# Altium PCB version_1.PcbDoc
Units mil, origin at the board's own origin, x right, y up, seen from the top; angles counter-clockwise.
Board outline 2508.5 x 2480.66 mil, 2 copper layers (Top Layer, Bottom Layer); 57 components, 60 nets, 267 pads, 58 vias.
Unrouted connection lines stored in the file: 46.
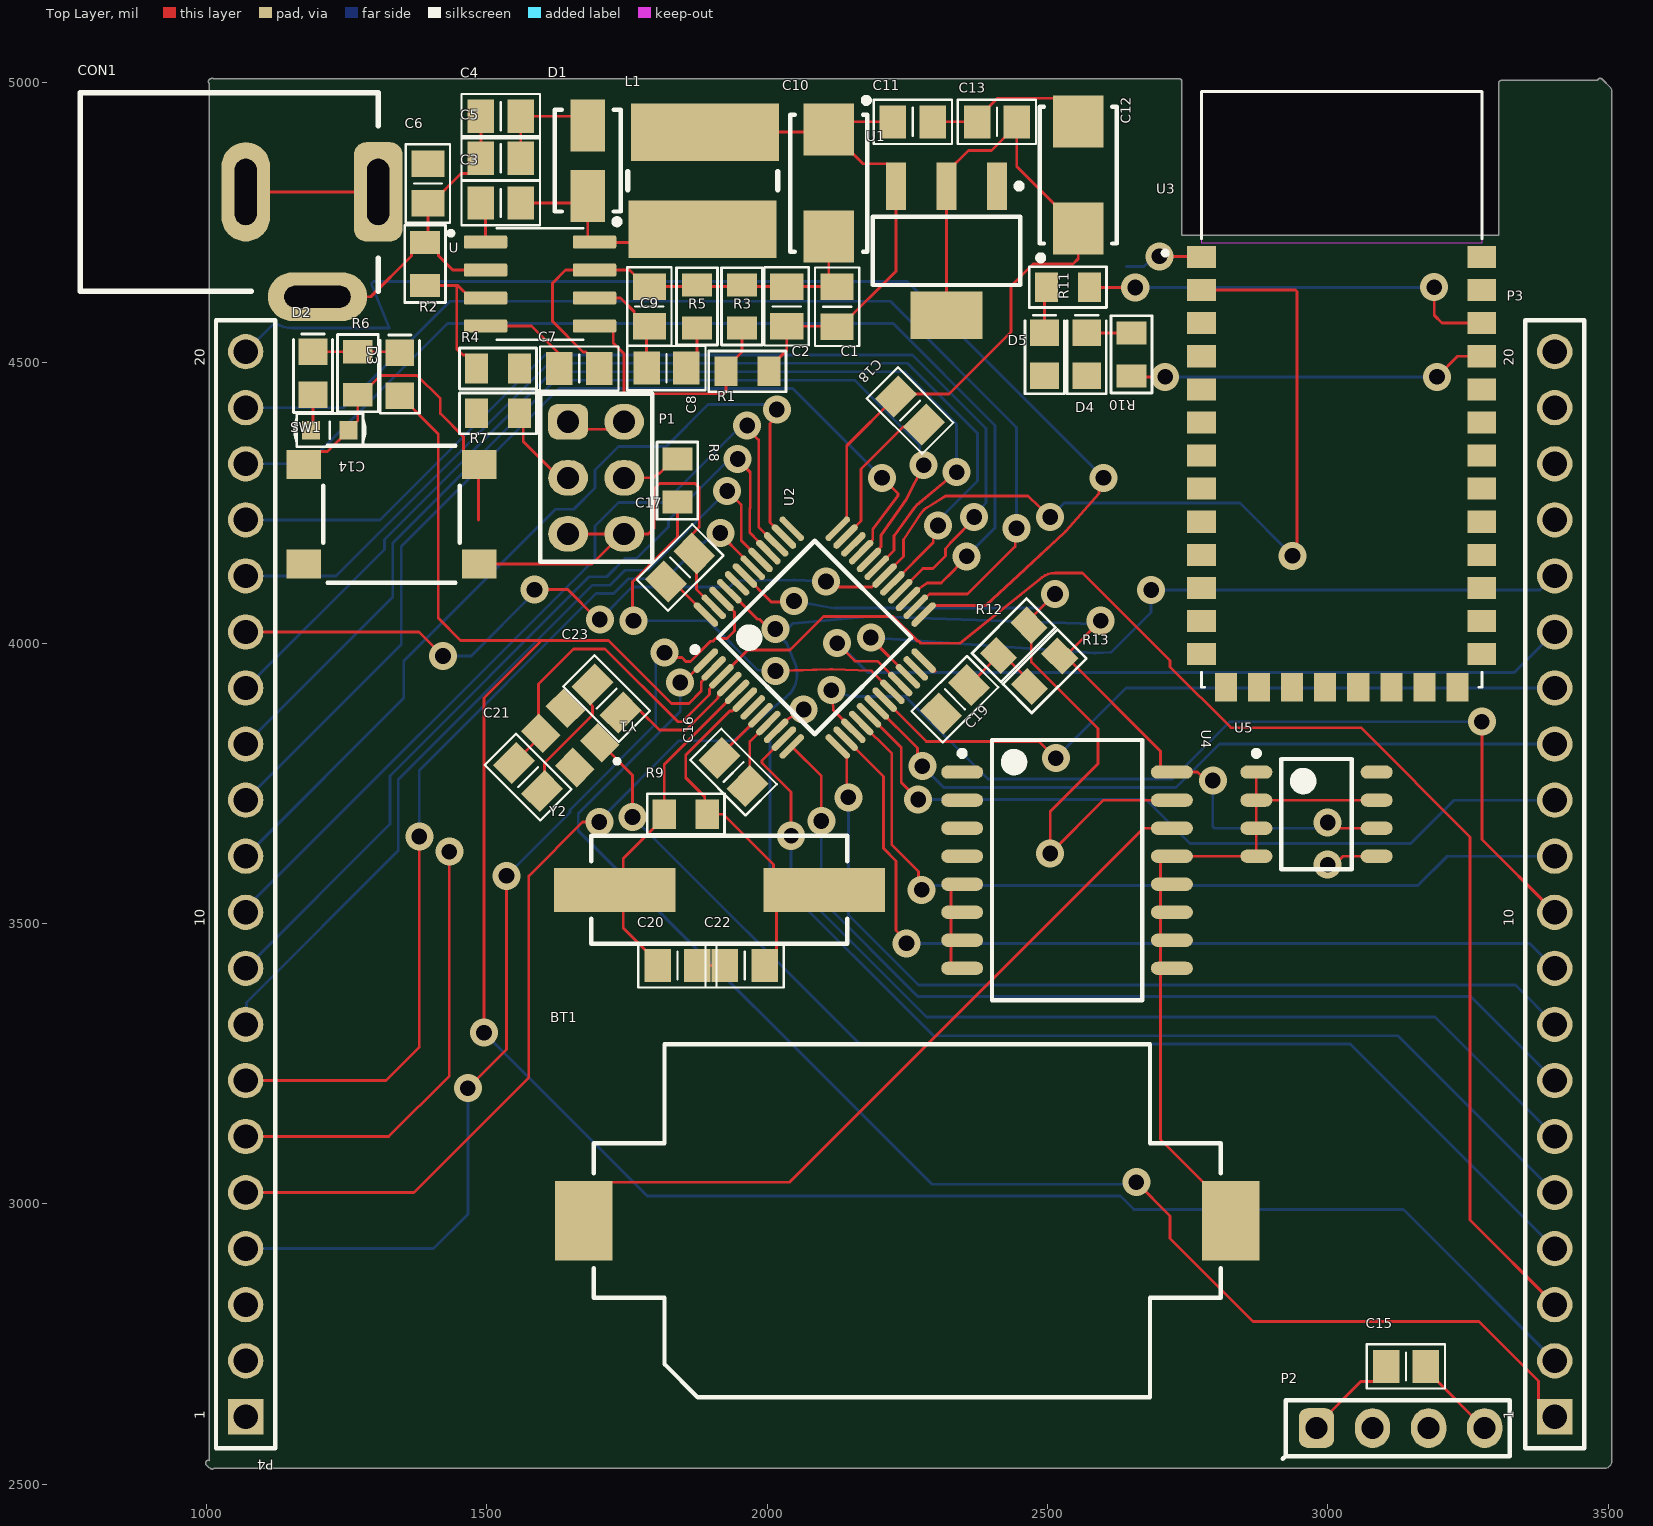
[diagram p0: Top Layer view]
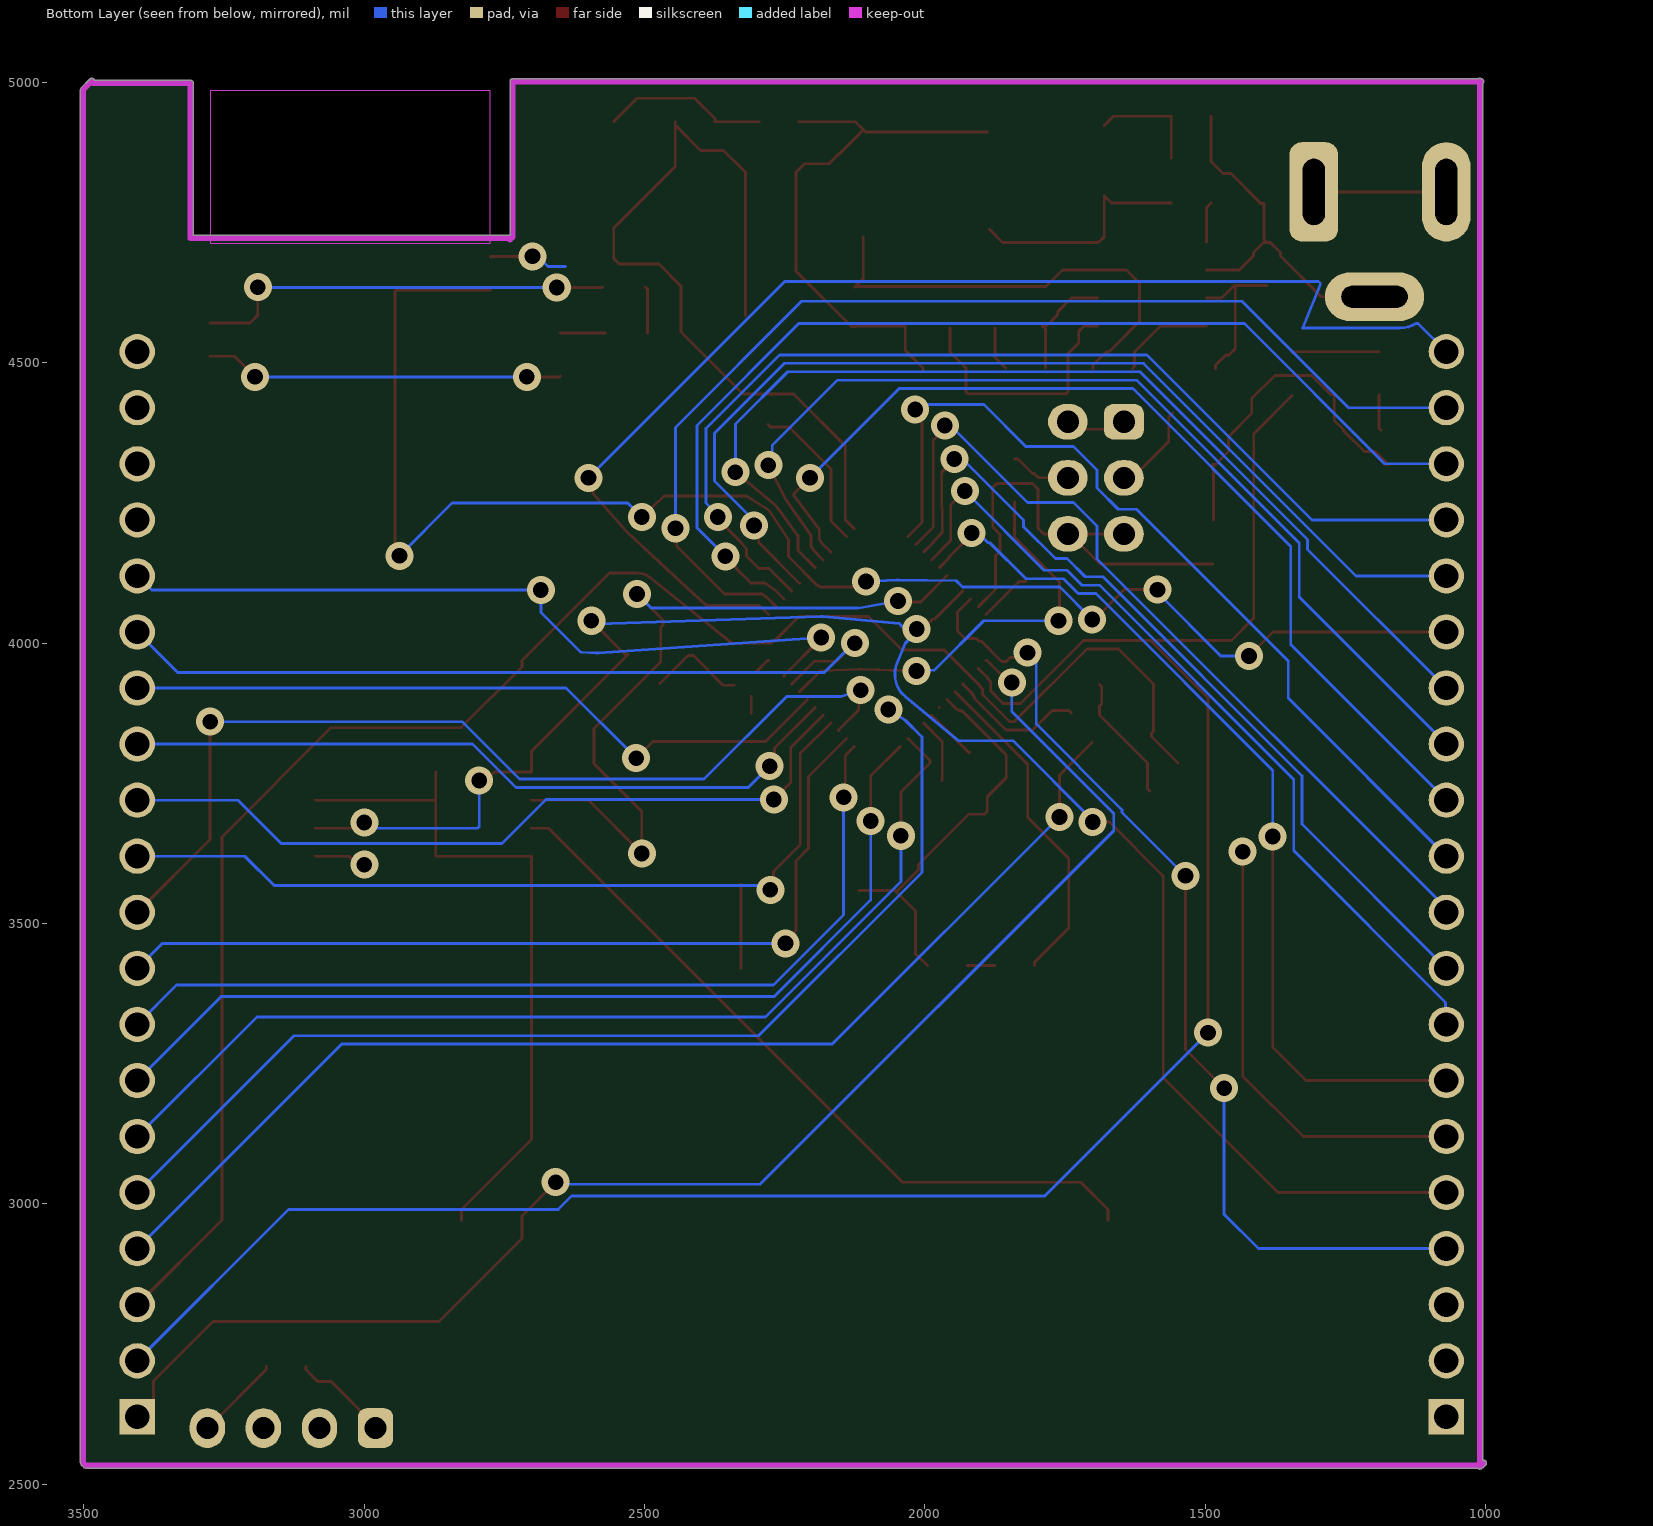
[diagram p1: Bottom Layer view, seen from below]

## Layer stack, top to bottom
Top Solder: solder mask 0.4, Solder Resist, Dk 3.5
Top Layer: signal copper 1.4
Dielectric 1: dielectric 12.6, FR-4, Dk 4.8
Bottom Layer: signal copper 1.4
Bottom Solder: solder mask 0.4, Solder Resist, Dk 3.5

## Board outline
1004.04,2529.58 999.75,2533.87 cw(c1003.29,2537.42) 1005.13,2542.08 1005.13,4997.95 1004.82,4998.23 cw(c1008.36,5001.78) 1007.37,5006.69 cw(c1010.14,5002.52) 1012.77,5006.79 2735,5006.79 cw(c2735,5001.77) 2740.01,5001.77 2740.01,4727.45 3304.99,4727.45 3304.99,4998.9 cw(c3310,4998.9) 3310,5003.91 3481.21,5003.91 cw(c3486.03,5002.52) 3489.57,5006.06 3505.32,4990.31 3506.79,4986.77 3506.79,2538.22 3505.32,2534.67 3500.23,2529.58 3496.68,2528.11 1013.46,2528.11 cw(c1010.14,2531.87)

## Design rules (kind name [scope] priority, off if disabled: settings)
Clearance [All] p1: gap=10 ignorepadtopadclearanceinfootprint=TRUE except(0: Arc-Hole Track-Hole SMDPad-Hole THPad-Hole Via-Hole Fill-Hole Poly-Hole Region-Hole Text-Hole)
PolygonConnect [All] p1: connectstyle=Relief reliefconductorwidth=10 reliefentries=4 polygonreliefangle="90 Angle" airgapwidth=10
RoutingVias [All] p1: holewidth=28 width=50 viastyle="Through Hole" minholewidth=28 minwidth=50 maxholewidth=28 maxwidth=50
SolderMaskExpansion [All] p1: expansion=4 istentingtop=FALSE
Width [All] p1: maxlimit=50 minlimit=5 preferedwidth=10
30 further rules are at their usual default settings.

## Classes and differential pairs
component class 06_I2C_DS3231: BT1 R12 R13 U4 U5
component class 05_Uart_Bluetooth: D4 D5 R10 R11 U3
component class 03_Power_supply: C1 C2 C3 C4 C5 C6 C7 C8 C9 C10 C11 C12 C13 CON1 D1 L1 R1 R2 R3 R4 R5 U U1
component class 04: C14 C15 C16 C17 C18 C19 C20 C21 C22 C23 D2 D3 P1 P2 P3 P4 R6 R7 R8 R9 SW1 U2 Y1 Y2

## Components (designator, comment, footprint, x,y, rotation, side; value= is the part's Value field where it differs from the comment)
BT1 "79527141" 79527141 2250,2970 r180 top
C1 "47uF" "C 0805" 2125,4600 r270 top
C2 "47uF" "C 0805" 2035,4600.63 r270 top
C3 "0.1uF" "C 0805" 1525,4785 r180 top
C4 "10uf" "C 0805" 1525,4940 r180 top
C5 "10uf" "C 0805" 1525,4865 r180 top
C6 "0.01uF" "C 0805" 1395,4820 r270 top
C7 "0.01uF" "C 0805" 1665,4490 r180 top
C8 "1000pF" "C 0805" 1820.43,4490.63 r180 top
C9 "47pF" "C 0805" 1790,4600.63 r270 top
C10 "22uF" "C SMD TAN 2312 (C)" 2110,4820.63 r270 top
C11 "100nF" "C 0805" 2260,4930 r180 top
C12 "22uF" "C SMD TAN 2312 (C)" 2555,4835 r90 top
C13 "100nF" "C 0805" 2410,4930 r0 top
C14 "C" "C 0603" 1220,4380 r180 top
C15 "104" "C 0805" 3139.57,2710 r180 top
C16 "104" "C 0805" 1940,3770 r315 top
C17 "104" "C 0805" 1845,4135 r225 top
C18 "104" "C 0805" 2255,4415 r135 top
C19 "104" "C 0805" 2335,3900 r45 top
C20 "20p" "C 0805" 1840,3425 r0 top
C21 "20p" "C 0805" 1573.8,3761.07 r315 top
C22 "20p" "C 0805" 1960,3425 r180 top
C23 "20p" "C 0805" 1713.8,3901.07 r135 top
CON1 "CON DC PWR" CONN/DC/PWR/5.0MM 1306.22,4805 r0 top
D1 "SS54F" "DO-214AC (SMA)" 1680,4860.63 r270 top
D2 "Led" "Led 0805" 1190,4481.61 r270 top
D3 "Led" "Led 0805" 1345,4480 r270 top
D4 "Led" "Led 0805" 2570,4515 r270 top
D5 "Led" "Led 0805" 2495,4515 r270 top
L1 "10uh" "Inductor SMD CDRH3D67" 1885,4825 r90 top
P1 "Header 3X2" HDR/Header/6/DL 1695,4295 r270 top
P2 "Header 4" HDR/Header/4 3130,2600 r0 top
P3 "3A, 250 V (AC)" 61302011121#1 3405,3570 r90 top
P4 "3A, 250 V (AC)" 61302011121#2 1070,3570 r90 top
R1 "8.2k" "R 0805" 1965,4485 r0 top
R2 "100k" "R 0805" 1390,4676.61 r90 top
R3 "1.6k" "R 0805" 1955,4600.63 r270 top
R4 "20k" "R 0805" 1520,4490 r180 top
R5 "30k" "R 0805" 1875,4600.63 r270 top
R6 "10k" "R 0805" 1270,4481.61 r270 top
R7 "100k" "R 0805" 1520,4410 r180 top
R8 "R" "R 0805" 1840,4290 r90 top
R9 "R" "R 0805" 1855,3695 r180 top
R10 "470" "R 0805" 2650,4515 r270 top
R11 "470" "R 0805" 2536.61,4635 r0 top
R12 "10k" "R 0805" 2440,4005 r45 top
R13 "4.7k" "R 0805" 2495,3950 r45 top
SW1 "430152043826" WS-TASV_L6W6H4.3_4301x20438x6 1330,4230 r180 top
U "TPS54231D" SOIC127P599X175-8N 1595,4640.63 r0 top
U1 "AMS1117-3.3V, 1A" "AMS1117-3.3V SOT223" 2320,4700 r270 top
U2 "STM32F103C8T6" STM32F103C8T6 2085,4010 r45 top
U3 "HC-05" XCVR_HC-05 3025,4440 r0 top
U4 "DS3231SN" DS3231SN-16SOIC 2535,3595 r0 top
U5 "AT24C512C-SSHD-T" M24M01-RMN6TP 2980,3695 r0 top
Y1 "32MHz" WE-XTAL_CFPX-180 1648.8,3831.07 r135 top
Y2 "8MHz" WE-XTAL_HC49/4HSMX 1915,3560 r180 top

## Footprints (in the part's own frame and the unit in brackets; to place one, negate y for a bottom-side part, rotate by r counter-clockwise, add the part's x,y. Pads: shape width x height; smd on the part's side, far side on the other; paste and mask are expansions set on the pad)
79527141 [mm] "Battery Holder"
  rect 2.6x3.6 smd: 1(14.65,0) 2(-14.65,0)
  silkscreen extent -14.2,-8 14.2,8, body extent -15.95,-8 15.95,8, height 5.66
61302011121#1 [mm] "Pin Header, pitch 2.54 mm, THT, Vertical, single row, 20p"
  rect 1.6x1.6 hole 1.1: 1(-24.13,0)
  round 1.6 hole 1.1: 2(-21.59,0) 3(-19.05,0) 4(-16.51,0) 5(-13.97,0) 6(-11.43,0) 7(-8.89,0) 8(-6.35,0) 9(-3.81,0) 10(-1.27,0) 11(1.27,0) 12(3.81,0) 13(6.35,0) 14(8.89,0) 15(11.43,0) 16(13.97,0) 17(16.51,0) 18(19.05,0) 19(21.59,0) 20(24.13,0)
  silkscreen extent -25.55,-1.34 25.55,1.34, body extent -25.4,-1.27 25.4,1.27, height 8.57
61302011121#2 [mm] "Pin Header, pitch 2.54 mm, THT, Vertical, single row, 20p"
  rect 1.6x1.6 hole 1.1: 1(-24.13,0)
  round 1.6 hole 1.1: 2(-21.59,0) 3(-19.05,0) 4(-16.51,0) 5(-13.97,0) 6(-11.43,0) 7(-8.89,0) 8(-6.35,0) 9(-3.81,0) 10(-1.27,0) 11(1.27,0) 12(3.81,0) 13(6.35,0) 14(8.89,0) 15(11.43,0) 17(16.51,0) 18(19.05,0) 19(21.59,0) 20(24.13,0) ``(13.97,0)
  silkscreen extent -25.55,-1.34 25.55,1.34, body extent -25.4,-1.27 25.4,1.27, height 8.57
"AMS1117-3.3V SOT223" [mm] "SOT223, 4-Leads, Body 6.51x7.00mm, Pitch 2.29mm"
  rect 2.15x0.9 smd: 1(-2.93,2.29) 2(-2.93,0) 3(-2.93,-2.29)
  rect 2.15x3.25 smd: 4(2.93,0)
  silkscreen extent -3.05,-3.35 1.55,3.42, body extent -3.5,-3.35 3.5,3.35, height 1.8
"C 0603" [mm] "Chip Capacitor, 2-Leads, Body 1.6x0.8mm, IPC Medium Density"
  rect 0.8x0.85 smd: 1(-0.85,0) 2(0.85,0)
  silkscreen extent -1.6,-0.75 1.6,0.75, body extent -0.8,-0.43 0.8,0.43, height 0.81
"C 0805" [mm] "Chip Capacitor, 2-Leads, Body 2.0x1.3mm, IPC Medium Density"
  rect 1.2x1.5 smd: 1(-0.9,0) 2(0.9,0)
  silkscreen extent -1.78,-1 1.78,1, body extent -1,-0.64 1,0.61, height 0.6
"C SMD TAN 2312 (C)" [mm] "Molded Capacitor, 2-Leads, Body 6.0x3.2mm, IPC Medium Density"
  rect 2.35x2.3 smd: 1(-2.425,0) 2(2.425,0)
  silkscreen extent -3.87,-1.75 3.1,1.83, body extent -3.09,-1.58 3.09,1.63, height 2.68
CONN/DC/PWR/5.0MM [mm]
  rrect50% 2.2x4.5 hole 1 slot 3 at 90 deg: 1(0,0)
  oval 2.2x4.5 hole 1 slot 3 at 90 deg: 2(-6,0)
  oval 4.5x2.2 hole 1 slot 3 at 0 deg: 3(-2.75,-4.75)
  silkscreen extent -13.5,-4.5 0,4.5, body extent -13.58,-5 0.25,4.5, height 11.02
"DO-214AC (SMA)" [mm] "Molded Diode, 2-Leads, Body 4.3x2.7mm, IPC Medium Density"
  rect 2.35x1.55 smd: 1(-1.6,0) 2(1.6,0)
  silkscreen extent -2.3,-1.5 2.89,1.5, body extent -2.6,-1.3 2.6,1.3, height 2.4
DS3231SN-16SOIC [mm] "SOIC, 16-Leads, Body 11.55x7.50mm, Pitch 1.27mm, IPC Medium Density"
  oval 1.9x0.6 smd: 1(-4.75,4.445) 2(-4.75,3.175) 3(-4.75,1.905) 4(-4.75,0.635) 5(-4.75,-0.635) 6(-4.75,-1.905) 7(-4.75,-3.175) 8(-4.75,-4.445) 9(4.75,-4.445) 10(4.75,-3.175) 11(4.75,-1.905) 12(4.75,-0.635) 13(4.75,0.635) 14(4.75,1.905) 15(4.75,3.175) 16(4.75,4.445)
  silkscreen extent -4.87,-5.9 3.4,5.9, body extent -5.16,-5.9 5.16,5.9, height 2.65
HDR/Header/4 [mm]
  rrect50% 1.6x1.8 hole 1: 1(-3.81,0)
  oval 1.6x1.8 hole 1: 2(-1.27,0) 3(1.27,0) 4(3.81,0)
  silkscreen extent -5.33,-1.4 4.95,1.27, body extent -5.08,-1.27 5.08,1.27, height 8.89
HDR/Header/6/DL [mm]
  rrect50% 1.6x1.8 hole 1: 1(-2.54,-1.27)
  oval 1.6x1.8 hole 1: 2(-2.54,1.27) 3(0,-1.27) 4(0,1.27) 5(2.54,-1.27) 6(2.54,1.27)
  silkscreen extent -3.94,-2.67 3.81,2.54, body extent -3.81,-2.54 3.81,2.54, height 8.89
"Inductor SMD CDRH3D67" [mm] "Precision Wire Wound Inductor, 2-Leads, Body 10.0x8.0mm, IPC Low Density"
  rect 2.6x6.7 smd: 1(-2.2,0) 2(2.2,-0.1)
  silkscreen extent -0.4,-3.4 0.4,3.4, body extent -3.35,-3.35 3.35,3.35, height 2.9
"Led 0805" [mm] "Led SMD 0805"
  rect 1.2x1.3 smd: 1(-0.975,0) 2(0.975,0)
  silkscreen extent -1.78,-0.89 1.78,0.89, body extent -1.01,-0.64 1.01,0.61, height 1.1
M24M01-RMN6TP [mm] "SOIC, 8-Leads, Body 4.90x3.90mm, Pitch 1.27mm, IPC Medium Density"
  oval 1.45x0.6 smd: 1(-2.725,1.905) 2(-2.725,0.635) 3(-2.725,-0.635) 4(-2.725,-1.905) 5(2.725,-1.905) 6(2.725,-0.635) 7(2.725,0.635) 8(2.725,1.905)
  silkscreen extent -2.85,-2.5 1.6,2.88, body extent -3,-2.5 3,2.5, height 1.25
"R 0805" [mm] "Chip Resistor, 2-Leads, Body 2.0x1.3mm, IPC Medium Density"
  rect 1.05x1.35 smd: 1(-0.975,0) 2(0.975,0)
  silkscreen extent -1.75,-0.93 1.75,0.93, body extent -1,-0.61 1,0.59, height 0.5
SOIC127P599X175-8N [mm]
  rrect25% 1.97x0.6 smd: 1(-2.47,1.905) 2(-2.47,0.635) 3(-2.47,-0.635) 4(-2.47,-1.905) 5(2.47,-1.905) 6(2.47,-0.635) 7(2.47,0.635) 8(2.47,1.905)
  silkscreen extent -4.14,-2.53 1.95,2.53
STM32F103C8T6 [mm] "TSQFP, 48-Leads, Body 7.00x7.00mm, Pitch 0.50mm, IPC Medium Density"
  oval 1.45x0.3 smd: 1(-4.225,2.75) 2(-4.225,2.25) 3(-4.225,1.75) 4(-4.225,1.25) 5(-4.225,0.75) 6(-4.225,0.25) 7(-4.225,-0.25) 8(-4.225,-0.75) 9(-4.225,-1.25) 10(-4.225,-1.75) 11(-4.225,-2.25) 12(-4.225,-2.75) 25(4.225,-2.75) 26(4.225,-2.25) 27(4.225,-1.75) 28(4.225,-1.25) 29(4.225,-0.75) 30(4.225,-0.25) 31(4.225,0.25) 32(4.225,0.75) 33(4.225,1.25) 34(4.225,1.75) 35(4.225,2.25) 36(4.225,2.75)
  oval 0.3x1.45 smd: 13(-2.75,-4.225) 14(-2.25,-4.225) 15(-1.75,-4.225) 16(-1.25,-4.225) 17(-0.75,-4.225) 18(-0.25,-4.225) 19(0.25,-4.225) 20(0.75,-4.225) 21(1.25,-4.225) 22(1.75,-4.225) 23(2.25,-4.225) 24(2.75,-4.225) 37(2.75,4.225) 38(2.25,4.225) 39(1.75,4.225) 40(1.25,4.225) 41(0.75,4.225) 42(0.25,4.225) 43(-0.25,4.225) 44(-0.75,4.225) 45(-1.25,4.225) 46(-1.75,4.225) 47(-2.25,4.225) 48(-2.75,4.225)
  silkscreen extent -4.35,-3.1 3.1,3.57, body extent -4.5,-4.5 4.5,4.5, height 1.6
WE-XTAL_CFPX-180 [mm] "Quartz Crystal, size CFPX-180, body 3.4x2.7mm"
  rect 1.4x1.15 smd: 1(-1.1,-0.8) 2(1.1,-0.8) 3(1.1,0.8) 4(-1.1,0.8)
  silkscreen extent -2.35,-0.85 -2.15,-0.65, body extent -1.7,-1.35 1.7,1.35, height 0.65
WE-XTAL_HC49/4HSMX [mm] "Quartz Crystal, size HC49/4HSMX, body 11.4x4.9mm"
  rect 5.5x2 smd: 1(-4.75,0) 2(4.75,0)
  silkscreen extent -5.8,-2.45 5.8,2.45, body extent -6.7,-2.45 6.7,2.45, height 4.3
WS-TASV_L6W6H4.3_4301x20438x6 [mm] "SMD Tact Switch, body 6x6mm"
  rect 1.55x1.3 smd: A1(-3.975,2.25) A2(3.975,2.25) B1(-3.975,-2.25) B2(3.975,-2.25)
  silkscreen extent -3.1,-3.1 3.1,3.1, body extent -4.5,-3.1 4.5,3.1, height 4.3
XCVR_HC-05 [mm]
  rect 1.3x1 smd: 1(-6.35,6.325) 2(-6.35,4.825) 3(-6.35,3.325) 4(-6.35,1.825) 5(-6.35,0.325) 6(-6.35,-1.175) 7(-6.35,-2.675) 8(-6.35,-4.175) 9(-6.35,-5.675) 10(-6.35,-7.175) 11(-6.35,-8.675) 12(-6.35,-10.175) 13(-6.35,-11.675) 22(6.35,-11.675) 23(6.35,-10.175) 24(6.35,-8.675) 25(6.35,-7.175) 26(6.35,-5.675) 27(6.35,-4.175) 28(6.35,-2.675) 29(6.35,-1.175) 30(6.35,0.325) 31(6.35,1.825) 32(6.35,3.325) 33(6.35,4.825) 34(6.35,6.325)
  rect 1x1.3 smd: 14(-5.25,-13.175) 15(-3.75,-13.175) 16(-2.25,-13.175) 17(-0.75,-13.175) 18(0.75,-13.175) 19(2.25,-13.175) 20(3.75,-13.175) 21(5.25,-13.175)
  Keep-Out Layer region: 6.35,6.95 -6.35,6.95 -6.35,13.85 6.35,13.85
  Keep-Out Layer region: 6.35,6.95 -6.35,6.95 -6.35,13.85 6.35,13.85
  silkscreen extent -8.1,-13.18 6.35,13.82

## Part data
BT1: "WA-BCPH Battery Holder, SMT, battery type 2032", Manufacturer="Wurth Elektronik", Operating Temperature Max=105°C, Operating Temperature Min=-40°C, Battery Type=2032, Category="Battery Holders", ComponentLink1Description="Website Link", ComponentLink1URL=https://www.we-online.com/redexpert/article/79527141?ad, ComponentLink2Description="Datasheet Link", ComponentLink2URL=https://www.we-online.com/redexpert/spec/79527141?ad, Manufacturer Part Number=79527141, Match Code=WA-BCPH, Mount="Surface Mount", Packaging="Tape and Reel"
C1 C2 C3 C4 C5 C6 C7 C8 C9 C11 C13 C14 C15 C16 C17 C18 C19 C20 C21 C22 C23: library part "Capacitor NP", "Capacitor non-pol"
C10 C12: library part Capacitor, "Capacitor pol"
CON1: "DC input connector"
D1: library part "Diode Schottky", "Schottky Diode"
D2 D3 D4 D5: "Typical LED"
L1: library part Inductor, "Inductor"
P1: "Header, 3-Pin, Dual row"
P2: "Header, 4-Pin"
P3 P4: library part 61302011121, "WR-PHD Pin Header, THT, pitch 2.54mm, Single Row, Vertical, 20p", Contact Resistance=20mOhm, LCSC Part #=N/A, Manufacturer="Wurth Elektronik", Operating Temperature Max="+ 85 C", Operating Temperature Min="- 25 C", Rated Current=3A, Supplier 1 Part Number=710-61302011121, Withstanding Voltage=500VAC, Working Voltage=250VAC, ComponentLink1Description=Datasheet, ComponentLink1URL=https://www.we-online.com/catalog/datasheet/61302011121.pdf, Gender="Pin Header", Manufacturer Part Number=61302011121, Mount=THT, Orientation=Vertical, Packaging=Bag, Pin Number=20, Pitch=2.54mm, Published Date="May 2020", Row Number=Single, Supplier 1=Mouser, Supplier 1 URL=https://www.mouser.vn/ProductDetail/Wurth-Elektronik/61302011121?qs=PhR8RmCirEbj%2FFsnpbhNaw%3D%3D, Supplier 2=Digi-Key, Supplier 2 Part Number=N/A, Supplier 2 URL=N/A, Supplier 3=thegioiic, Supplier 3 Part Number=N/A, Supplier 3 URL=N/A
R1 R2 R3 R4 R5 R6 R7 R8 R9 R10 R11 R12 R13: library part Resistor, "Resistor"
SW1: "WS-TASV SMT Tact Switch, L6 x W6 x H4.3mm, 260g, SPST-NO, 12V, 50mA", LCSC Part #=N/A, Manufacturer="Wurth Elektronik", Operating Temperature Max=85°C, Operating Temperature Min=-40°C, Package / Case=0805, Rated Current=50mA, Rated Voltage=12VDC, Supplier 1 Part Number=710-430152043826, Supplier 2 Part Number=732-6991-2-ND, Supplier 3 Part Number=OEM, Category="Tact Switches", Circuit=SPST-NO, ComponentLink1Description=Datasheet, ComponentLink1URL=https://www.we-online.com/redexpert/spec/430152043826?ad, Contact Material="Stainless Steel", Height=4.3mm, Length=6mm, Manufacturer Part Number=430152043826, Match Code=WS-TASV, Mount="Surface Mount", Operation Force=260g, Packaging="Tape and Reel", Supplier 1=Mouser, Supplier 1 URL=https://www.mouser.vn/ProductDetail/Wurth-Elektronik/430152043826?qs=wr8lucFkNMUjBcFj1giTsA%3D%3D, Supplier 2=Digi-Key, Supplier 2 URL=https://www.digikey.com/en/products/detail/w%C3%BCrth-elektronik/430152043826/5208994, Supplier 3=thegioiic, Supplier 3 URL=https://www.thegioiic.com/nut-nhan-6x6mm-cao-4-3mm-4-chan-smd, Terminal Material="Copper Alloy", Terminal Plating=Silver, Washable=No, Width=6mm
U: "å…·æœ‰Eco-modeï¼†tradeçš„3.5è‡³28Vè¾“å…¥ï¼Œ2Aï¼Œ570kHzé™åŽ‹è½¬æ¢å™¨ï¼›8-SOIC -40è‡³150", PACKAGE="SOIC-8 Texas Instruments", Availability=Unavailable, DigiKey-Purchase-URL=https://snapeda.com/shop?store=DigiKey&id=456068, MF="Texas Instruments", MP=TPS54231D, Price=None, SnapEDA_Link=https://www.snapeda.com/parts/TPS54231D/Texas%20Instruments/view-part/456068/?ref=snap, Texas_Instruments-Purchase-URL=https://snapeda.com/shop?store=Texas+Instruments&id=456068
U1: library part AMS1117-3.3V, "1A 60dB@(120Hz) Fixed 3.3V Positive electrode 12V SOT-223 Linear Voltage Regulators (LDO) ROHS", Current Input Maximum=N/A, Current Output Maximum=1A, LCSC Part #=C347222, Manufacturer=AMS, Operating Temperature Max="+ 85 C", Operating Temperature Min="- 40 C", Voltage Input Maximum=15V, Voltage Output=3.3V, ComponentLink1Description=Datasheet, ComponentLink1URL=http://www.advanced-monolithic.com/pdf/ds1117.pdf, Manufacturer Part Number=N/A, Mount=SMD/SMT, Packaging="Tape and Reel", Pad Count=4, Supplier 1=Mouser, Supplier 1 Part Number=N/A, Supplier 1 URL=N/A, Supplier 2=Digi-Key, Supplier 2 Part Number=N/A, Supplier 2 URL=N/A, Supplier 3=thegioiic, Supplier 3 Part Number=N/A, Supplier 3 URL=https://www.thegioiic.com/ams1117-3-3v-ic-on-ap-3-3v-1a-sot-223
U2: "ARM Microcontrollers - MCU 32BIT Cortex M3 64KB 20KB RAM 2X12 ADC", LCSC Part #=C8734, Manufacturer=STMicroelectronics, Manufacturer Part Number=STM32F103C8T6TR, Operating Temperature Max="+ 85 C", Operating Temperature Min="- 40 C", Package / Case=LQFP48, Supplier 1 Part Number=511-STM32F103C8T6, Supplier 2 Part Number=497-17666-2-ND, Supply Voltage - Max="3.6 V", Supply Voltage - Min="2 V", ComponentLink1Description=Datasheet, ComponentLink1URL=https://www.mouser.com/datasheet/2/389/stm32f103c8-1851025.pdf, Mount=SMD/SMT, Packaging="Tape and Reel", Pad Count=48, Part Number=STM32F103C8T6, Supplier 1=Mouser, Supplier 1 URL=https://www.mouser.com/ProductDetail/STMicroelectronics/STM32F103C8T6?qs=bhCVus9SdFtq6kqxsU5%2FDA%3D%3D, Supplier 2=Digi-Key, Supplier 2 URL=https://www.digikey.com/en/products/detail/stmicroelectronics/stm32f103c8t6tr/2122442, Supplier 3=thegioiic, Supplier 3 Part Number=STM32F103C8T6, Supplier 3 URL=https://www.thegioiic.com/stm32f103c8t6-32-bit-arm-cortex-m3-microcontroller-72mhz-64kb-flash-48-lqfp
U3: "Bluetooth to Serial Port Module", PACKAGE=None, Availability=Unavailable, MP=HC-05, Price=None
U4: library part DS3231SN-16SOIC, "IC RTC CLK/CALENDAR I2C 16SOIC", LCSC Part #=N/A, Manufacturer="Analog Devices Inc./Maxim Integrated", Operating Supply Current="110 - 170 (µA)", Operating Temperature Max="+ 85 C", Operating Temperature Min="- 40 C", Package / Case=SOIC-16, Supplier 1 Part Number=700-DS3231SN-, Supplier 2 Part Number=DS3231SN#-ND, Supply Voltage - Max="5.5 V", Supply Voltage - Min="2.3 V", ComponentLink1Description=Datasheet, ComponentLink1URL=https://www.analog.com/media/en/technical-documentation/data-sheets/DS3231.pdf, Manufacturer Part Number=DS3231SN, Mount=SMD/SMT, Packaging="Tape and Reel", RTC Bus Interface="I2C, Serial", RTC Memory Size=N/A, Supplier 1=Mouser, Supplier 1 URL=https://www.mouser.com/ProductDetail/Analog-Devices-Maxim-Integrated/DS3231SN?qs=ffX8NcjNb2RmKAb9wAk9Ug%3D%3D, Supplier 2=Digi-Key, Supplier 2 URL=https://www.digikey.com/en/products/detail/analog-devices-inc-maxim-integrated/DS3231SN/1197576, Supplier 3=thegioiic, Supplier 3 Part Number=N/A, Supplier 3 URL=https://www.thegioiic.com/ds3231sn-ic-rtc-clock-calendar-16-soic, Time Format="HH:MM:SS (12 hr, 24 hr)"
U5: "EEPROM SERIAL EEPROM 512K (64K X 8) 2WIRE 2.5V", LCSC Part #=C12371, Manufacturer=Microchip, Maximum Clock Frequency="1 MHz", Operating Temperature Max="+ 85 C", Operating Temperature Min="- 40 C", Package / Case=SOIC-8, Supplier 1 Part Number=556-AT24C512C-SSHD-T, Supplier 2 Part Number=AT24C512C-SSHD-TTR-ND, Supply Voltage - Max="5.5 V", Supply Voltage - Min="2.5 V", ComponentLink1Description=Datasheet, ComponentLink1URL=https://www.mouser.vn/datasheet/2/268/AT24C512C_I_c2_b2C_Compatible__Two_Wire__Serial_EE-2306430.pdf, Interface Type="2-Wire, I2C", Manufacturer Part Number=AT24C512C-SSHD-T, Memory Size="512 kbit", Mount=SMD/SMT, Packaging="Tape and Reel", Supplier 1=Mouser, Supplier 1 URL=https://www.mouser.vn/ProductDetail/Microchip-Technology/AT24C512C-SSHD-T?qs=Oaf4mloV4cM7Q6xetGfOtg%3D%3D, Supplier 2=Digi-Key, Supplier 2 URL=https://www.digikey.com/en/products/detail/microchip-technology/at24c512c-sshd-t/3046245, Supplier 3=thegioiic, Supplier 3 Part Number=AT24C512C-SSHD-T, Supplier 3 URL=https://www.thegioiic.com/at24c512c-sshd-t-ic-eeprom-512kbit-8-soic
Y1: library part 073525326010, "WE-XTAL Quartz Crystal, SMT, CFPX-180, 32MHz, +/-30ppm", Frequency Stability=+/-16ppm, Frequency Tolerance=+/-10ppm, LCSC Part #=N/A, Load Capacitance=9pF, Manufacturer=NDK, Manufacturer Part Number=NX3225SA-32MHZ-EXS00A-CS02368, Operating Temperature Max="+ 70 C", Operating Temperature Min="+ 20 C", Package / Case=CFPX-180/3525, Supplier 1 Part Number=344-NX3225SA32MHZEXS, Supplier 2 Part Number=644-1208-2-ND, ComponentLink1Description=Datasheet, ComponentLink1URL=https://www.mouser.com/datasheet/2/905/ndk_04232018_NX3225SA-32MHZ-EXS00A-CS02368-1324924.pdf, Frequency=32MHz, Mounting Technology=SMT, Packaging="Tape and Reel", Supplier 1=Mouser, Supplier 1 URL=https://www.mouser.com/ProductDetail/NDK/NX3225SA-32MHZ-EXS00A-CS02368?qs=55YtniHzbhCu90OOsHDzwg%3D%3D, Supplier 2=Digi-Key, Supplier 2 URL=https://www.digikey.com/en/products/detail/ndk-america-inc/nx3225sa-32mhz-exs00a-cs02368/3946316, Supplier 3=thegioiic, Supplier 3 Part Number=N/A, Supplier 3 URL=N/A
Y2: library part 071105086016, "WE-XTAL Quartz Crystal, SMT, HC49/4HSMX, 8MHz, +/-30ppm", Frequency Stability=+/-50ppm, Frequency Tolerance=+/-30ppm, Load Capacitance=16pF, Manufacturer="Wurth Elektronik", Manufacturer Part Number=830003151, Operating Temperature Max="+ 60 C", Operating Temperature Min="- 10 C", Package / Case=HC49/4HSMX, Supplier 1 Part Number=710-830003151, Supplier 2 Part Number=732-830003151TR-ND, Supplier 3 Part Number=N/A, ComponentLink1Description=Datasheet, ComponentLink1URL=https://katalog.we-online.com/pbs/datasheet/830003151.pdf, Frequency=8MHz, Mount=SMD/SMT, Packaging="Tape and Reel", Supplier 1=Mouser, Supplier 1 URL=https://www.mouser.com/ProductDetail/Wurth-Elektronik/830003151?qs=2WXlatMagcHisY7XHApyYg%3D%3D, Supplier 2=Digi-Key, Supplier 2 URL=https://www.digikey.com/en/products/detail/w%C3%BCrth-elektronik/830003151/13979296, Supplier 3=thegioiic, Supplier 3 URL=https://www.thegioiic.com/thach-anh-8mhz-2-chan-smd-hc49-s

## Via types
v1: diameter 50, hole 28, Top Layer to Bottom Layer, 58 vias

## Nets (pads, with @x,y where several pads share a name; then routed paths per layer and width w, separated by ;. In a path a pad name is that pad's centre, name@x,y a point inside that pad or via, vN(x,y) a via of type N, cw(c..) or ccw(c..) an arc to the next point about the centre after c; other vN are vias at no path point)
5V: C1.2 C2.2 C10.1 C11.2 L1.2 P3.17 P4.3 R1.2 U1.3 | length 1001
  Top Layer w5: L1.2 2105.51,4911.61 C10.1 ; R1.2 2003.39,4490.91 2035,4522.52 C2.2 2124.37,4565.2 C1.2 2130.91,4564.57 2229.84,4663.5 U1.3 2229.84,4839.96 2214.63,4855.18 2170.93,4855.18 2153.76,4872.34 2152.78,4872.34 2110,4915.12 C10.1 ; C11.2 2123.9,4930 C10.1
BOOT0: R7.2 U2.44
BOOT1: R8.1 U2.20 | length 759.4
  Top Layer w5: v1(1761.56,4040) 1760,4041.56 1760,4109.44 1840,4189.44 R8.1 ; v1(2015,3950.35) 2113.35,3953.58 cw(c2114.58,3916.1) 2116.18,3953.57 2186.05,3950.71 U2.20
  Bottom Layer w5: v1(1761.56,4040) 1895,4040 1980,3955 1982.93,3952.07 v1(2015,3950.35)
GND: BT1.2 C1.1 C2.1 C4.1 C5.1 C6.1 C7.1 C9.1 C10.2 C11.1 C12.2 C13.1 C14.2 C15.2 C16.1 C17.1 C18.1 C19.1 CON1.1 CON1.2 D1.1 D2.2 D4.2 D5.2 P1.5 P1.6 P2.1 P3.19 P3.20 P4.2 R3.1 R4.1 R5.1 SW1.A1 SW1.A2 U1.1 U2.8 U2.23 U2.35 U2.47 U3.13 U3.21 U3.22 U4.5 U4.6 U4.7 U4.8 U4.9 U4.10 U4.11 U4.12 U4.13 U5.1 U5.2 U5.3 U5.4 U5.7 U.7 | length 4405.7
  Top Layer w5: CON1.2 CON1.1 ; C14.2 1190,4383.46 D2.2 ; SW1.A1 1687.48,4141.42 P1.6@1741.06,4195 ; C5.1 C4.1 1663.62,4940 D1.1 ; P1.5 P1.6@1741.06,4195 ; C7.1 1700.43,4495.91 1676.81,4519.53 1671.81,4519.53 1617.07,4574.26 1617.07,4642.07 1640.63,4665.63 U.7 1754.53,4665.63 1784.09,4636.06 C9.1 1875,4636.06 1955,4636.06 C2.1 C1.1@2124.37,4636.06 ; U2.47 1874.23,4095.5 1874.23,4155.88 C17.1 1865.88,4164.23 1865.88,4194.1 1879.07,4207.3 1879.07,4277.46 1871.75,4284.78 1808.25,4284.78 1798.09,4274.63 1798.09,4205.16 1787.93,4195 P1.6 P1.6@1741.06,4195 ; C16.1@1919.94,3805.05 1921.81,3805.05 U2.8 ; C10.2 2110,4650.43 C1.1@2124.37,4636.06 ; C1.1 C1.1@2124.37,4636.06 ; U2.35 2167.5,4217.77 2167.5,4310.53 2242.74,4385.77 2275.88,4385.77 C18.1 ; C11.1 C13.1 2374.57,4935.91 2410.69,4972.03 2513.44,4972.03 C12.2 ; C19.1 C19.1@2309.95,3904.82 ; U4.8@2327.99,3420 U4.5@2327.99,3570 ; BT1.2 2826.77,2989.69 2702.01,3114.45 2702.01,3620 U4.13 U5.4 U5.3 U5.2 ; U5.1 U5.2 ; P2.1 2980,2603.94 3059.04,2682.97 3083.01,2682.97 3104.13,2704.09 C15.2 ; U5.7 U5.2
NetBT1_1: BT1.1 U4.14 | length 1330.3
  Top Layer w5: BT1.1 1673.23,2989.69 1721.91,3038.37 2039.74,3038.37 2671.38,3670 U4.14@2702.01,3670
NetC3_1: C3.1 D1.2 L1.1 U.8 | length 416.3
  Top Layer w5: C3.1 1667.36,4785 D1.2 1680,4724.91 1689.28,4715.63 U.8 1692.87,4715 1861.61,4715 L1.1
NetC3_2: C3.2 U.1 | length 72.8
  Top Layer w5: C3.2 1497.76,4776.81 U.1
NetC7_2: C7.2 U.4 | length 178.3
  Top Layer w5: U.4 1579.85,4565.63 1625.95,4519.53 1625.95,4493.62 C7.2
NetC8_1: C8.1 R5.2 | length 79.5
  Top Layer w5: C8.1 1875,4509.76 R5.2
NetC8_2: C8.2 C9.2 U.6 | length 198.1
  Top Layer w5: U.6 1738.52,4615.63 1762.97,4591.18 1762.97,4586.32 1784.09,4565.2 C9.2 1785,4560.2 C8.2
NetC20_2: C20.2 C22.2 | length 49.1
  Top Layer w5: C20.2 C22.2
NetC21_2: C21.2 C23.2 | length 230.6
  Top Layer w5: C21.2 1603.03,3740.19 1603.03,3786.43 1688.44,3871.84 1688.44,3888.2 1684.57,3892.08 1684.57,3921.95 C23.2
NetD4_1: D4.1 R10.1 | length 80
  Top Layer w5: D4.1 R10.1
NetD5_1: D5.1 R11.1 | length 83
  Top Layer w5: D5.1 2495,4631.77 R11.1
NetP1_3: P1.3 R7.1 | length 159.7
  Top Layer w5: R7.1 1565,4403.39 1565,4360 1630,4295 P1.3
NetP1_4: P1.4 R8.2 | length 108.8
  Top Layer w5: P1.4 1797.25,4295 1804.86,4302.61 1808.32,4302.61 1834.09,4328.39 R8.2
NetR1_1: R1.1 R3.2 U.5 | length 463.8
  Top Layer w5: U.5 1716.29,4565.63 1725.57,4556.35 1725.57,4535.69 1745,4516.26 1745,4447.93 1747.93,4445 1923.68,4445 1926.61,4447.93 R1.1 1926.61,4490.91 1955,4519.29 R3.2
NetR2_1: R2.1 R4.2 U.3 | length 284
  Top Layer w5: R2.1 1448.19,4638.23 ; R4.2 1481.61,4495.76 1463.44,4513.93 1457.69,4513.93 1446.48,4525.14 1446.48,4636.52 1448.19,4638.23 ; U.3 1470.79,4615.63 1448.19,4638.23
NetR10_2: R10.2 U3.31 | length 640.9
  Top Layer w5: R10.2 2651.61,4475 v1(2710,4475) ; v1(3195,4475) 3231.85,4511.85 U3.31
  Bottom Layer w5: v1(2710,4475) v1(3195,4475)
NetR11_2: R11.2 U3.32 | length 756.3
  Top Layer w5: R11.2 2575.56,4634.44 v1(2656.73,4634.44) ; v1(3190,4635) 3190,4585 3204.09,4570.91 U3.32
  Bottom Layer w5: v1(2656.73,4634.44) 2657.01,4634.72 3189.72,4634.72 v1(3190,4635)
OSCIN: C20.1 R9.2 U2.5 Y2.2 | length 597.7
  Top Layer w5: C20.1 1804.57,3430.91 1743.37,3492.1 1743.37,3558.91 1743.37,3615.85 1816.61,3689.09 R9.2 1816.61,3783.37 U2.5
OSCOUT: C22.1 R9.1 U2.6 Y2.1 | length 711.5
  Top Layer w5: U2.6 1943.11,3882.03 1941.27,3882.03 1938.09,3878.85 1933.3,3878.85 1855,3800.55 1855,3760 1888.85,3726.15 1888.85,3699.53 R9.1 1921.56,3695 2011.62,3604.94 2011.62,3595.78 2048.49,3558.91 Y2.1@2053.43,3558.91 ; C22.1 2016.56,3446.12 2016.56,3522.04 Y2.1@2053.43,3558.91 ; Y2.1@2117.39,3558.91 Y2.1@2053.43,3558.91
PA0: P3.5 U2.10 | length 2018.7
  Top Layer w5: U2.10 2035.05,3862.61 2037.98,3865.54 v1(2065.35,3881.8)
  Bottom Layer w5: v1(2065.35,3881.8) 2035.05,3862.61 2005.4,3832.97 2005.4,3590.96 2296.58,3299.78 3125.22,3299.78 P3.5
PA1: P3.6 U2.11 | length 1843.3
  Top Layer w5: U2.11 1990.8,3790.53 1990.8,3786.39 2042.9,3734.29 v1(2042.9,3656.51)
  Bottom Layer w5: v1(2042.9,3656.51) 2042.9,3574.68 2284.12,3333.46 3191.54,3333.46 P3.6
PA2: P3.7 U2.12 | length 1737.3
  Top Layer w5: U2.12 2096.75,3763.01 v1(2096.75,3682.97)
  Bottom Layer w5: v1(2096.75,3682.97) 2096.75,3542.04 2268.85,3369.94 3255.06,3369.94 P3.7
PA3: P3.8 U2.13 | length 1649.4
  Top Layer w5: U2.13 2142.07,3799.82 2142.07,3732.93 2145,3730 v1(2145,3725)
  Bottom Layer w5: v1(2145,3725) 2145,3515 2269.97,3390.04 3334.96,3390.04 P3.8
PA4: P3.9 U2.14 | length 1585.1
  Top Layer w5: U2.14 2207.5,3762.23 2207.5,3634.12 2230,3611.62 2230,3487.8 2248.53,3469.28 v1(2248.53,3464.51)
  Bottom Layer w5: v1(2248.53,3464.51) 3360.49,3464.51 P3.9
PA5: P3.10 U2.15 | length 1747
  Top Layer w5: v1(2114.58,3916.1) 2118.07,3885.24 2118.07,3880.71 2153.9,3844.88 U2.15 ; v1(3275,3860) 3275,3650 P3.10
  Bottom Layer w5: v1(2114.58,3916.1) 2149.55,3905 2246.34,3905 2393.84,3757.5 2723.25,3757.5 2825.75,3860 v1(3275,3860)
PA6: P3.11 U2.16 | length 1496.4
  Top Layer w5: U2.16 2222.5,3802.9 2222.5,3640.33 2270.33,3592.5 2270.33,3565.33 v1(2275.65,3560)
  Bottom Layer w5: v1(2275.65,3560) 2283.15,3567.5 3160.64,3567.5 3213.14,3620 P3.11
PA7: P3.12 U2.17 | length 1386.8
  Top Layer w5: U2.17 2239.34,3813.9 2239.34,3751.38 v1(2269.53,3721.19)
  Bottom Layer w5: v1(2269.53,3721.19) 2675.58,3721.19 2754.27,3642.5 3148.14,3642.5 3225.64,3720 P3.12
PA8: P4.`` U2.29 | length 1845
  Top Layer w5: U2.29 2296.39,4179.63 2296.39,4201.39 v1(2305,4210)
  Bottom Layer w5: P4.`` 1230.98,4120 1610.14,4499.17 2250.83,4499.17 2375.54,4374.46 2375.54,4289.63 2305,4219.08 v1(2305,4210)
PA9: P4.15 U2.30 U3.2 | length 2789.8
  Top Layer w5: P4.15 1379.17,4020 v1(1421.89,3977.28) ; v1(1585.1,4095.56) 1644.44,4095.56 1696.04,4043.96 1700,4043.96 v1(1701.6,4042.36) ; v1(2105,4110) 2117.18,4110 2127.01,4100.17 2187.24,4100.17 2190.42,4103.35 2192.27,4103.35 2243.34,4154.43 2243.34,4184.66 2273.7,4230.65 cw(c2305,4210) 2285.51,4242.04 2319.24,4262.63 2465.2,4262.63 v1(2505,4225) ; U3.2 2942.07,4629.96 2945,4627.03 2945,4163.53 v1(2937.37,4155.9)
  Bottom Layer w5: v1(1421.89,3977.28) 1472.28,3977.28 1585.1,4090.1 v1(1585.1,4095.56) ; v1(1701.6,4042.36) 1759.25,4100 1932.89,4100 1944.21,4111.32 2047.38,4112.78 cw(c2047.91,4075.29) 2049.77,4112.74 v1(2105,4110) ; v1(2505,4225) 2530,4250 2843.28,4250 v1(2937.37,4155.9)
PA10: P4.14 U2.31 U3.1 | length 2008.3
  Top Layer w5: U2.31 2226.61,4165.53 2226.61,4191.66 2262.6,4240.95 cw(c2305,4210) 2271.65,4250.55 v1(2338.04,4305.16) ; v1(2700,4690) 2774.02,4690 U3.1
  Bottom Layer w5: P4.14 1317.36,4167.36 1317.36,4185.16 1616.36,4484.17 2244.62,4484.17 2338.04,4390.74 v1(2338.04,4305.16) ; 2641.2,4671.94 2672.09,4671.94 2690.15,4690 v1(2700,4690)
PA11: P4.13 U2.32 | length 1813.8
  Top Layer w5: U2.32 2199.05,4165.81 2199.05,4167.65 2203.31,4171.92 2203.31,4193.02 2248.25,4256.39 v1(2279.33,4317.53)
  Bottom Layer w5: P4.13 1332.36,4082.36 1332.36,4178.95 1622.57,4469.17 2155.83,4469.17 2272.47,4352.53 2272.47,4324.4 v1(2279.33,4317.53)
PA12: P4.12 U2.33 | length 1775.6
  Top Layer w5: U2.33 2185.13,4179.73 2185.13,4181.57 2188.31,4184.75 2188.31,4201.24 2188.31,4203.31 2233.25,4262.6 2233.25,4266.75 v1(2205,4295)
  Bottom Layer w5: P4.12 1347.36,3997.36 1347.36,4172.74 1628.78,4454.17 2045.83,4454.17 v1(2205,4295)
PA15: P4.11 U2.38 | length 1584.4
  Top Layer w5: v1(2017.37,4416.67) 2017.37,4404.49 2005,4392.12 2005,4215.27 U2.38
  Bottom Layer w5: P4.11 1351.97,3901.97 1351.97,3968.12 1622.84,4239 1655.15,4239 1692.93,4276.78 1692.93,4309.09 1734.85,4351 1820.11,4351 1894.82,4425.71 1996.15,4425.71 2005.2,4416.67 v1(2017.37,4416.67)
PB0: P3.13 U2.18 | length 1314.4
  Top Layer w5: U2.18 2268.23,3812.85 2268.23,3789.36 v1(2276.84,3780.75)
  Bottom Layer w5: v1(2276.84,3780.75) 2315.09,3742.5 2729.47,3742.5 2806.97,3820 P3.13
PB1: P3.14 U2.19 | length 1290.4
  Top Layer w5: U2.19 2284.06,3824.86 2485.14,3824.86 v1(2515,3795)
  Bottom Layer w5: v1(2515,3795) 2640,3920 P3.14
PB3: P4.10 U2.39 | length 1526.2
  Top Layer w5: v1(1964.55,4388.21) 1964.55,4383.14 1985,4362.69 1985,4207.44 U2.39
  Bottom Layer w5: P4.10 1070,3527.43 1692.93,4150.36 1692.93,4209.09 1734.85,4251 1816.99,4251 1954.19,4388.21 v1(1964.55,4388.21)
PB4: P4.9 U2.40 | length 1500.8
  Top Layer w5: v1(1947.5,4328.48) 1947.5,4327.52 1970,4305.02 1970,4241.21 1969.03,4240.24 1969.03,4197.41 1984.87,4181.57 1984.87,4179.73 U2.40
  Bottom Layer w5: P4.9 1327.17,3677.17 1327.17,3763.38 1682.25,4118.46 1714.07,4118.46 1746.61,4151 1767.16,4151 1823.92,4207.77 1823.92,4219.68 1924.12,4319.87 1938.89,4319.87 v1(1947.5,4328.48)
PB5: P4.8 U2.41 | length 1497.2
  Top Layer w5: v1(1928.76,4271.48) 1954.03,4246.22 1954.03,4182.73 U2.41
  Bottom Layer w5: P4.8 1071.22,3321.22 1071.22,3359 1342.17,3629.95 1342.17,3757.17 1688.46,4103.46 1720.28,4103.46 1746.82,4130 1787.28,4130 v1(1928.76,4271.48)
PB6: P4.7 U2.42 | length 1626.1
  Top Layer w5: P4.7 1320,3220 1379.67,3279.67 v1(1379.67,3655.22) ; v1(1916.53,4196.48) 1916.53,4194.23 1957.03,4153.73 1957.03,4151.89 U2.42
  Bottom Layer w5: v1(1379.67,3655.22) 1379.67,3773.46 1694.67,4088.46 1726.49,4088.46 1753.03,4115 1820,4115 1884.26,4179.26 1887.79,4179.26 1905.02,4196.48 v1(1916.53,4196.48)
PB7: P4.6 R12.2 U2.43 U4.15 U5.5 | length 2290.8
  Top Layer w5: P4.6 1325,3120 1433.22,3228.22 v1(1433.22,3628.16) ; U2.43 2007.42,4073.67 2046.29,4073.67 v1(2047.91,4075.29) ; v1(2513.48,4087.83) 2467.14,4041.49 R12.2 2471.32,4027.97 2471.32,3966.3 2590,3847.62 2590,3785 2505,3700 v1(2505,3625) 2600,3720 U4.15@2702.01,3720 ; v1(3000,3605) 3012.18,3605 3027.18,3620 U5.5
  Bottom Layer w5: v1(2047.91,4075.29) 2119.47,4062.5 2121.54,4062.5 2488.15,4062.5 v1(2513.48,4087.83)
PB8: P4.5 R13.2 U2.45 U4.16 U5.6 | length 3239.1
  Top Layer w5: P4.5 1370,3020 1575,3225 1575,3585 1670.98,3680.98 v1(1700.68,3680.98) ; U2.45 1982.6,4042.8 1986.14,4042.8 2003.59,4025.35 v1(2014.65,4025.35) ; v1(2595,4040) 2534.99,3979.99 2529.3,3979.99 2702.01,3807.28 2702.01,3770 2767.82,3770 2782.82,3755 v1(2795,3755) ; v1(3000,3680) 3000,3670 U5.6
  Bottom Layer w5: v1(1700.68,3680.98) 1700.68,3683.71 1843.08,3826.11 1940.4,3826.11 2034.83,3904.62 ; v1(2014.65,4025.35) v1@2020,4020 ; 2034.84,3904.63 ccw(c2001.5,3944.71) 2049.6,3964.81 2035.04,3999.78 2020,4014.82 v1@2020,4020 ; v1(2595,4040) 2589.57,4034.57 2560,4034.57 2559.57,4035 2186.32,4047.48 ccw(c2185,4010) 2181.61,4047.35 2045.43,4035 2043.96,4033.54 2030.43,4020 v1@2020,4020 ; v1(2795,3755) 2795,3672.93 2797.93,3670 3000,3670 v1(3000,3680)
PB9: P4.4 U2.46 | length 1765
  Top Layer w5: v1(1466.25,3206.37) 1535,3275.12 v1(1535,3585) ; v1(1817.16,3983.15) 1825.77,3974.54 1847.95,3974.54 1854.99,3967.5 1863.36,3967.5 1899.21,4003.35 1903.35,4003.35 1908.18,4008.18 1928.18,4008.18 1941.67,4021.67 1941.67,4055.89 U2.46
  Bottom Layer w5: P4.4 1405,2920 1466.25,2981.25 v1(1466.25,3206.37) ; v1(1535,3585) 1648.18,3698.18 1648.18,3702.73 1801.24,3855.79 v1@1801.24,3965.64
PB10: P3.15 U2.21 | length 1474.2
  Top Layer w5: v1(2125,4000) 2157.06,3967.94 2196.66,3967.94 U2.21
  Bottom Layer w5: v1(2125,4000) 2127.18,4000 2179.5,3947.67 3332.67,3947.67 P3.15
PB11: P3.16 U2.22 | length 1397.1
  Top Layer w5: v1(2185,4010) 2185,4008.72 2251.34,3942.38 U2.22
  Bottom Layer w5: v1(2185,4010) 2582.5,3982.58 ccw(c2585,4020) 2586.96,3982.55 2612.05,3983.86 2613.96,3983.96 2615.32,3985.32 2685,4055 v1(2685,4095) 3378.99,4095 3403.99,4120 P3.16
PB12: P4.20 U2.25 | length 2249.1
  Top Layer w5: U2.25 2295.18,4067.07 2390,4067.07 2460.51,4132.51 ccw(c2435,4160) 2461.84,4133.81 2530.5,4197.51 ccw(c2505,4225) 2533.13,4200.21 2592.02,4267.02 2592.02,4287.02 v1(2600,4295)
  Bottom Layer w5: P4.20 1120.28,4570.28 1122.35,4570.28 1123.72,4570.28 ccw(c1152.68,4617.99) 1152.68,4562.18 1326.22,4562.18 1294.91,4639.04 1294.91,4640 1294.91,4642.07 1296.38,4643.54 1297.84,4645 2250,4645 v1(2600,4295)
PB13: P4.19 U2.26 | length 1982.2
  Top Layer w5: U2.26 2282.57,4082.29 2284.41,4082.29 2289.62,4087.5 2357.5,4087.5 2442.5,4172.5 2442.5,4202.5 v1(2445,4205)
  Bottom Layer w5: P4.19 1244.4,4420 1434.4,4610 2220,4610 2445,4385 v1(2445,4205)
PB14: P4.18 U2.27 | length 1905.3
  Top Layer w5: U2.27 2267.34,4094.91 2284.62,4106.64 cw(c2287.43,4102.5) 2287.43,4107.5 2310.53,4107.5 2332.18,4129.15 v1(2355.91,4154.92)
  Bottom Layer w5: P4.18 1180,4320 1430,4570 2225,4570 2406.81,4388.19 2406.81,4205.97 2355.91,4155.07 v1(2355.91,4154.92)
PB15: P4.17 U2.28 | length 1855.4
  Top Layer w5: U2.28 2237.42,4093.03 2277.79,4133.41 2296.09,4133.41 2318.34,4155.66 2318.34,4168.46 2327.15,4178.99 cw(c2355.91,4154.92) 2330.53,4182.53 ccw(c2305,4210) 2331.6,4183.56 2369.31,4221.5 v1(2369.31,4225.13)
  Bottom Layer w5: P4.17 1309.77,4220 1603.93,4514.17 2259.62,4514.17 2390.54,4383.24 2390.54,4249.85 2375.54,4234.85 v1@2375.54,4227.74
PC13: D3.2 P3.2 U2.2 | length 3911
  Top Layer w5: D3.2 1413.39,4373.23 1413.39,4044.68 1453.21,4004.86 1597.66,4004.86 ; v1(1494.9,3305.14) 1494.9,3902.1 1597.66,4004.86 ; U2.2 1887.43,3937.71 1887.43,3935.86 1882.5,3930.93 1882.5,3914.47 1860.53,3892.5 1829.47,3892.5 1717.11,4004.86 1597.66,4004.86
  Bottom Layer w5: v1(1494.9,3305.14) 1786.22,3013.81 2630.39,3013.81 2654.2,2990 3135,2990 P3.2
PC14: C21.1 P3.3 U2.3 Y1.3 | length 3149.5
  Top Layer w5: C21.1 1595.91,3833.29 Y1.3 1592.43,3842.9 1592.43,3927.43 1654.86,3989.86 1710.9,3989.86 1840.75,3860 1849.25,3860 1897.5,3908.25 1897.5,3918.09 1901.35,3921.95 1901.35,3923.79 1965.45,3987.88 2013.08,3987.88 ; 2013.11,3987.85 2040.88,3987.85 2100.53,4047.5 2224.69,4047.5 2268.84,4003.35 2270.79,4003.35 2274.15,3999.99 2344.14,3999.99 2490.01,4117.07 cw(c2513.48,4087.83) 2513.48,4125.33 2562.71,4125.33 2718.95,3969.08 2718.95,3957.7 2827.38,3849.28 3059.12,3849.28 3253.99,3654.4 3253.99,2971.01 P3.3
PC15: C23.1 P3.4 U2.4 Y1.1 | length 2367.8
  Top Layer w5: Y1.1 1760,3764.41 v1(1760,3690) ; C23.1 1743.03,3880.19 1772.9,3880.19 1808.09,3845 1855.46,3845 1912.5,3902.04 1912.5,3905.25 1915.27,3908.03 1915.27,3909.87 U2.4
  Bottom Layer w5: v1(1760,3690) 2165.22,3284.78 3040.22,3284.78 P3.4
RESET: C14.1 R6.2 SW1.B1 SW1.B2 U2.7 | length 608.7
  Top Layer w5: SW1.B2@1178.43,4318.58 SW1.B2 1196.59,4341.67 1216.12,4341.67 1253.46,4379.02 C14.1 1253.46,4380.98 1270,4397.52 R6.2 1275.91,4443.23 1310.41,4477.74 1375.77,4477.74 1417.13,4436.38 1417.13,4409.57 1458.48,4368.21 1458.48,4341.67 1481.57,4318.58 SW1.B1 1485,4317.09 1485,4220 ; U2.7 U2.7@1974.88,3885.42
SWCLK: P2.2 U2.37
SWDIO: P2.3 U2.34
VBAT: P3.1 U2.1 | length 2623.6
  Top Layer w5: v1(1845,3930) 1850.04,3930 1888.98,3968.94 U2.1 ; v1(2658.77,3038.47) 2718.89,2978.34 2718.89,2938.15 2867.05,2790 3270,2790 3376,2684 3376,2649 P3.1
  Bottom Layer w5: v1(1845,3930) 1845,3878.34 1663.18,3696.52 1663.18,3665.45 2293.63,3035 2655.3,3035 v1(2658.77,3038.47)
VCC: C4.2 C5.2 C6.2 CON1.3 R2.2 U.2 | length 645.2
  Top Layer w5: CON1.3 1292.99,4617.99 1365.93,4690.93 1365.93,4696.83 1384.09,4715 R2.2 ; C4.2 C5.2 1489.57,4859.09 1468.44,4837.97 1454.31,4837.97 1400.91,4784.57 C6.2 1395,4720 R2.2 ; U.2 1439.37,4665.63 1413.93,4691.07 1413.93,4696.83 1395.76,4715 R2.2
VCC3V3: C12.1 C13.2 C15.1 C16.2 C17.2 C18.2 C19.2 D2.1 D3.1 P1.1 P1.2 P2.4 P3.18 P4.1 R6.1 R12.1 R13.1 U1.2 U1.4 U2.9 U2.24 U2.36 U2.48 U3.12 U4.2 U5.8 | length 2293.9
  Top Layer w5: D2.1 R6.1 1343.39,4520 D3.1 ; P1.1 1658.25,4381.75 P1.2@1745,4381.75 ; P1.2 P1.2@1748.94,4395 ; C17.2 1831.94,4109.95 U2.48 ; C16.2@1970.05,3754.95 1969.23,3755.77 1969.23,3824.63 U2.9 ; U2.36 2142.07,4220.18 2142.07,4352.18 C18.2 2234.12,4444.23 2324.23,4444.23 2435,4555 2435,4636.69 2474.57,4676.26 2545.49,4676.26 2555,4685.77 C12.1 2555,4740.51 2445.43,4850.08 C13.2@2445.43,4924.09 ; U2.24 2281.02,3968.94 U2.24@2299.96,3950 ; U1.4 U1.2 2320,4839.96 2359.11,4879.07 2400.41,4879.07 C13.2@2445.43,4924.09 ; C19.2@2339.95,3925.05 C19.2 R12.1 2422.86,3977.86 R13.1@2472.86,3927.86 ; C13.2 C13.2@2445.43,4924.09 ; C15.1 3175,2704.09 3279.09,2600 P2.4
pads on no net: U3.3 U3.4 U3.5 U3.6 U3.7 U3.8 U3.9 U3.10 U3.11 U3.14 U3.15 U3.16 U3.17 U3.18 U3.19 U3.20 U3.23 U3.24 U3.25 U3.26 U3.27 U3.28 U3.29 U3.30 U3.33 U3.34 U4.1 U4.3 U4.4 Y1.2 Y1.4

## Keep-outs
Bottom Layer:
  lines w10: 1003.29,2537.42 1007.59,2533.12 3496.68,2533.12 3501.78,2538.22 3501.78,4986.77 3486.03,5002.52 ; 1008.36,5001.78 1008.37,5001.77 2735,5001.77 2735,4725.03 2740.01,4720.02 ; 1010.14,2531.87 1010.14,5002.52 ; 2737.51,4722.43 3310,4722.43 3310,4998.9 3483.88,4998.9 3486.76,5001.78

## Text inside footprints (layer, text, board x,y; h text height)
BT1: Top 3D Body "ZONE FOR ADHESIVE FIXATION" at 2525.59,3166.52 h30 r180
P3: Top Overlay "10" at 3338.07,3495.2 h30 r90; Top Overlay "1" at 3338.07,2615.28 h30 r90; Top Overlay "20" at 3338.07,4495.2 h30 r90
P4: Top Overlay "20" at 1003.07,4495.2 h30 r90; Top Overlay "1" at 1003.07,2615.28 h30 r90; Top Overlay "10" at 1003.07,3495.2 h30 r90